# Altium PCB TP3.PcbDoc
Units mm, origin at the board's own origin, x right, y up, seen from the top; angles counter-clockwise.
Board outline 41 x 58.5 mm, 2 copper layers (Top Layer, Bottom Layer); 33 components, 18 nets, 67 pads, 2 vias.
Unrouted connection lines stored in the file: 40.
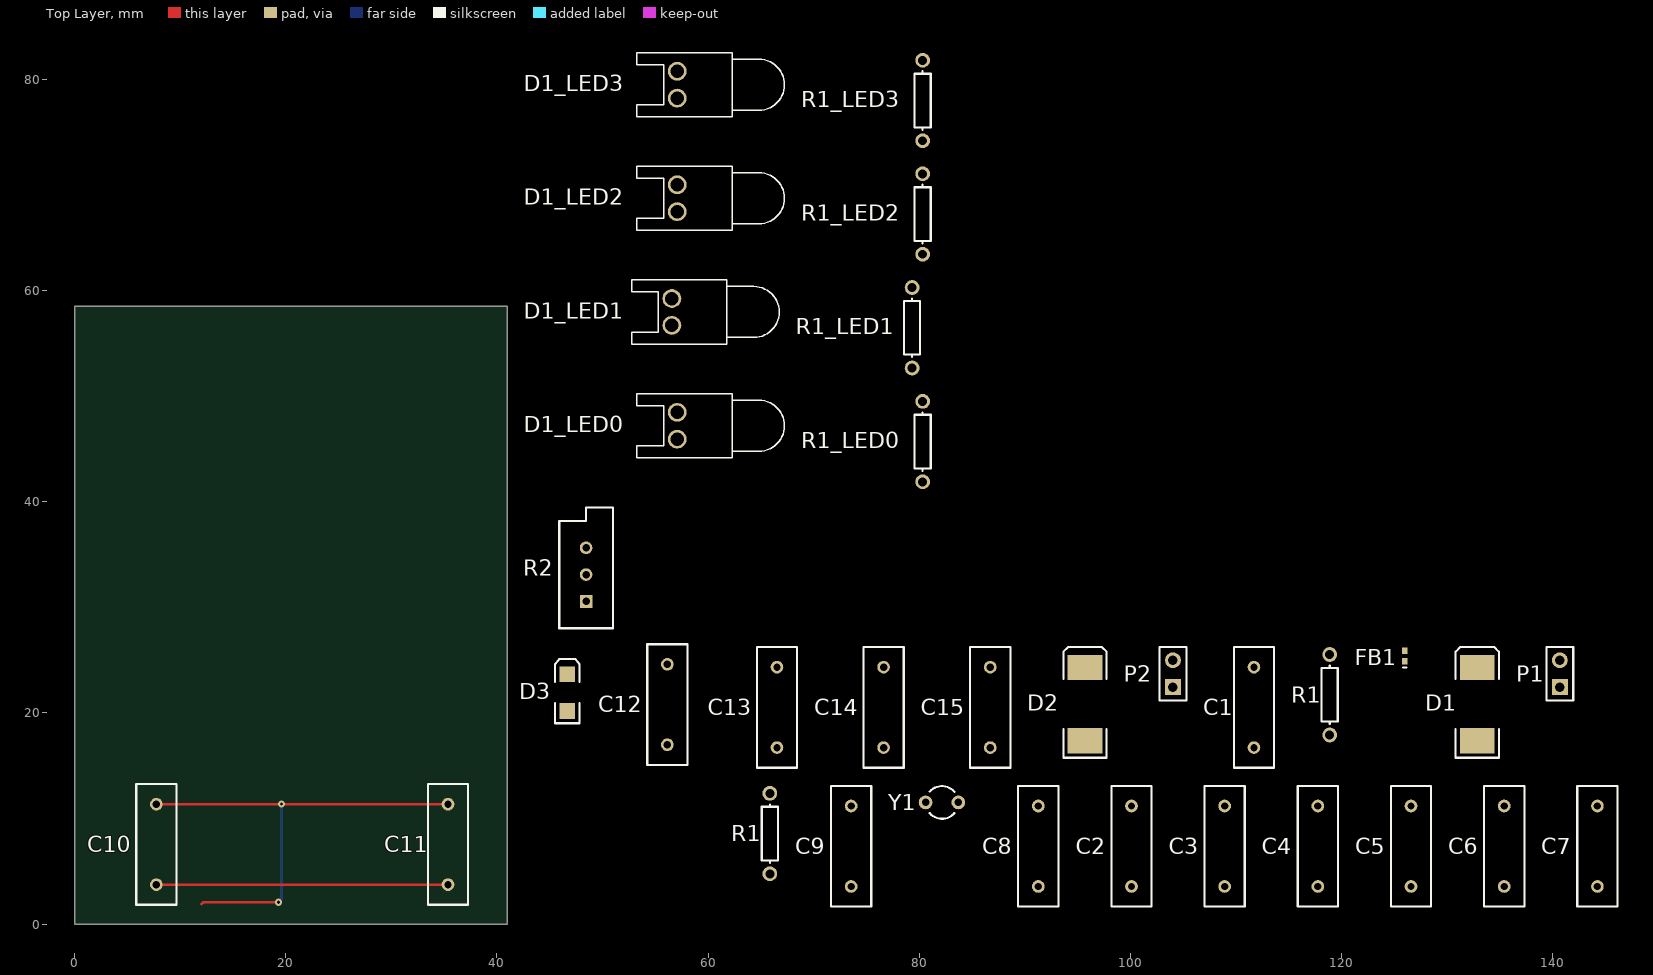
[diagram p0: Top Layer view]
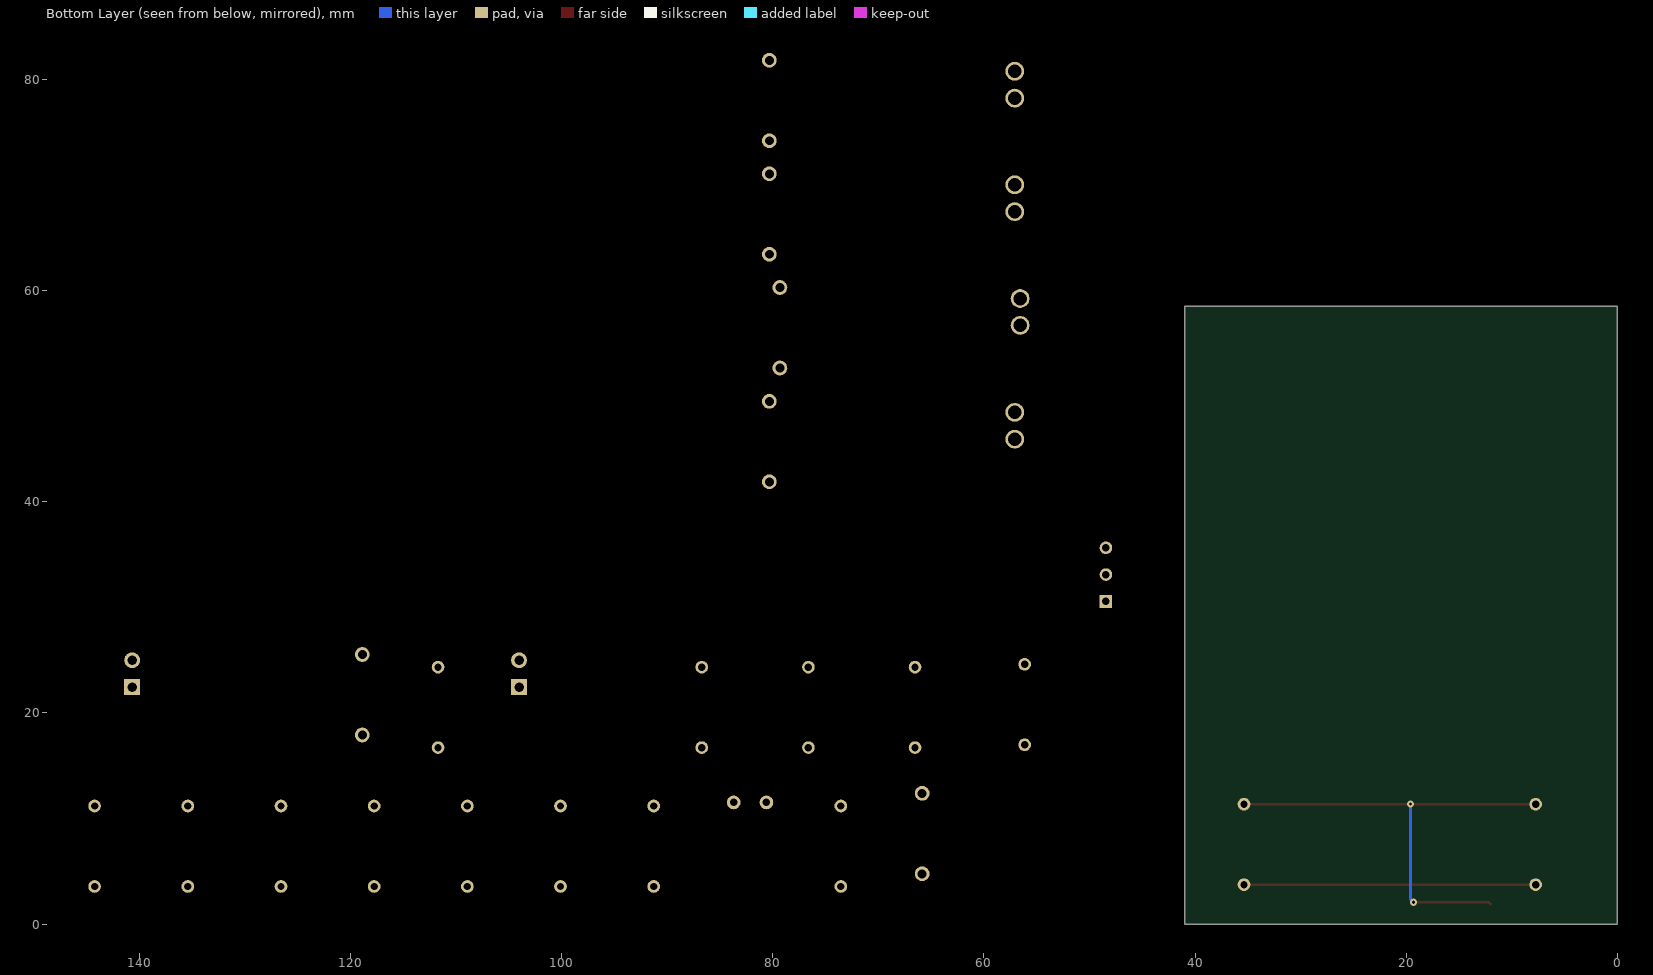
[diagram p1: Bottom Layer view, seen from below]

## Layer stack, top to bottom
Top Solder: solder mask 0.0102, Solder Resist, Dk 3.5
Top Layer: signal copper 0.0356
Dielectric 1: dielectric 0.32, FR-4, Dk 4.8
Bottom Layer: signal copper 0.0356
Bottom Solder: solder mask 0.0102, Solder Resist, Dk 3.5

## Board outline
0,0 41,0 41,58.5 0,58.5

## Design rules (kind name [scope] priority, off if disabled: settings)
Clearance [All] p1: gap=0.2
HoleSize [All] p1: absolutevalues=TRUE maxlimit=5 minlimit=0.3 maxpercent=80.000 minpercent=20.000
PolygonConnect [All] p1: connectstyle=Relief reliefconductorwidth=0.254 reliefentries=4 polygonreliefangle="90 Angle" airgapwidth=0.254
RoutingVias [All] p1: holewidth=0.3 width=0.7 viastyle="Through Hole" minholewidth=0.3 minwidth=0.7 maxholewidth=1 maxwidth=1.4
SolderMaskExpansion [All] p1: expansion=0.102
UnpouredPolygon [All] p1: allowunpoured=FALSE
Width [All] p1: maxlimit=5 minlimit=0.2 preferedwidth=0.2
28 further rules are at their usual default settings.

## Classes and differential pairs
component class LED0: D1_LED0 R1_LED0
component class LED1: D1_LED1 R1_LED1
component class LED2: D1_LED2 R1_LED2
component class LED3: D1_LED3 R1_LED3
component class PIC: C2 C3 C4 C5 C6 C7 C8 C9 C10 C11 J1 R1 U1 Y1
component class POWER: C1 C12 C13 C14 C15 D1 D2 D3 FB1 P1 P2 R1 U2
component class TP2: R2
net class LED[0..3]: LED0 LED1 LED2 LED3
channel class led: LED0 LED1 LED2 LED3

## Components (designator, comment, footprint, x,y, rotation, side; value= is the part's Value field where it differs from the comment)
C1 "10uF" RAD-0.3 111.709,20.53 r90 top
C2 "100nF" RAD-0.3 100.109,7.379 r90 top
C3 "100nF" RAD-0.3 108.934,7.379 r90 top
C4 "100nF" RAD-0.3 117.759,7.379 r90 top
C5 "100nF" RAD-0.3 126.585,7.379 r90 top
C6 "100nF" RAD-0.3 135.41,7.379 r90 top
C7 "100nF" RAD-0.3 144.236,7.379 r90 top
C8 "20pF" RAD-0.3 91.283,7.379 r90 top
C9 "20pF" RAD-0.3 73.557,7.379 r90 top
C10 "10uF" RAD-0.3 7.75,7.55 r90 top
C11 "1uF" RAD-0.3 35.375,7.55 r90 top
C12 "10uF" RAD-0.3 56.15,20.8 r90 top
C13 "10uF" RAD-0.3 66.532,20.53 r90 top
C14 "1uF" RAD-0.3 76.632,20.53 r90 top
C15 "100nF" RAD-0.3 86.733,20.53 r90 top
D1 "GF1A" SMC 132.86,20.83 r90 top
D1_LED0 "Green LED" LED-0 57.081,47.206 r90 top (schematic designator D1)
D1_LED1 "Green LED" LED-0 56.581,57.982 r90 top (schematic designator D1)
D1_LED2 "Green LED" LED-0 57.081,68.757 r90 top (schematic designator D1)
D1_LED3 "Green LED" LED-0 57.081,79.508 r90 top (schematic designator D1)
D2 "GF1A" SMC 95.708,20.83 r90 top
D3 "Green LED" 3.2X1.6X1.1 46.675,21.925 r90 top
FB1 "600r" 0402-A 125.985,25.405 r90 top
P1 "12V Main" HDR1X2 140.686,22.455 r90 top
P2 "12V Battery" HDR1X2 104.034,22.455 r90 top
R1 "470r" AXIAL-0.3 118.884,21.73 r90 top
R1 "4.7K" AXIAL-0.3 65.857,8.579 r90 top
R1_LED0 "330r" AXIAL-0.3 80.333,45.706 r90 top (schematic designator R1)
R1_LED1 "330r" AXIAL-0.3 79.333,56.481 r90 top (schematic designator R1)
R1_LED2 "330r" AXIAL-0.3 80.333,67.257 r90 top (schematic designator R1)
R1_LED3 "330r" AXIAL-0.3 80.333,78.007 r90 top (schematic designator R1)
R2 "1K" VR5 48.456,33.105 r90 top
Y1 "8MHz" R38 82.158,11.529 r90 top

## Footprints (in the part's own frame and the unit in brackets; to place one, negate y for a bottom-side part, rotate by r counter-clockwise, add the part's x,y. Pads: shape width x height; smd on the part's side, far side on the other; paste and mask are expansions set on the pad)
3.2X1.6X1.1 [mm] "SMT LED; 2 Flat Leads"
  rect 1.5x1.5 smd: 1(-1.75,0) 2(1.75,0)
  silkscreen extent -2.9,-1.15 3.2,1.15
0402-A [mm] "Chip Inductor, Body 1.0x0.5mm, IPC High Density"
  rect 0.6x0.5 smd: 1(-0.5,0) 2(0.5,0)
  silkscreen extent -1.1,-0.15 -1.1,0.15, body extent -0.55,-0.3 0.55,0.3, height 0.55
AXIAL-0.3 [mm] "Axial Device, Thru-Hole; 2 Leads; 0.3 in Pin Spacing"
  round 1.4 hole 0.85: 1(-3.81,0) 2(3.81,0)
  silkscreen extent -2.77,-0.76 2.77,0.76
HDR1X2 [mm] "Connector; Header; 2 Position"
  rect 1.5x1.5 hole 0.9: 1(0,0)
  round 1.5 hole 0.9: 2(2.54,0)
  silkscreen extent -1.27,-1.27 3.81,1.27
LED-0 [mil] "LED; 2 Leads"
  round 70 hole 50: 1(50,0) 2(-50,0)
  silkscreen extent -120,-400 120,150
R38 [mm] "Crystal, Thru-Hole; 2 Leads; Body 3.1 x 8.2 mm (Dia.xH)"
  round 1.3 hole 0.7: 1(0,1.55) 2(0,-1.55)
  silkscreen extent -1.55,-1.19 1.55,1.17
RAD-0.3 [mm] "Radial Cap, Thru-Hole; 2 Leads; 0.3 in Pin Spacing"
  round 1.2 hole 0.7: 1(-3.81,0) 2(3.81,0)
  silkscreen extent -5.72,-1.91 5.71,1.91
SMC [mm] "DO-214-AB/SMC; 2 C-Bend Leads; Body 7.9 x 5.9 mm, inc. leads (LxW)"
  rect 2.4x3.3 smd: 1(-3.475,0) 2(3.475,0)
  silkscreen extent -5.07,-2.05 5.43,2.05
VR5 [mm] "Thru-Hole; 3 Leads"
  rect 1.2x1.2 hole 0.7: 1(-2.54,0)
  round 1.2 hole 0.7: 2(0,0) 3(2.54,0)
  silkscreen extent -5.08,-2.54 6.35,2.54

## Part data
C1 C2 C3 C4 C5 C6 C7 C8 C9 C10 C11 C12 C13 C14 C15: library part Cap, "Capacitor"
D1 D2: library part Diode, "Default Diode"
D1_LED0 D1_LED1 D1_LED2 D1_LED3: library part LED0, "Typical INFRARED GaAs LED"
D3: library part LED2, "Typical RED, GREEN, YELLOW, AMBER GaAs LED"
FB1: library part Inductor, "Inductor"
P1 P2: library part "Header 2", "Header, 2-Pin"
R1 R1 R1_LED0 R1_LED1 R1_LED2 R1_LED3: library part Res1, "Resistor"
R2: library part RPot, "Potentiometer"
Y1: library part XTAL, "Crystal Oscillator"

## Via types
v1: diameter 0.7, hole 0.3, Top Layer to Bottom Layer, 2 vias

## Nets (pads, with @x,y where several pads share a name; then routed paths per layer and width w, separated by ;. In a path a pad name is that pad's centre, name@x,y a point inside that pad or via, vN(x,y) a via of type N, cw(c..) or ccw(c..) an arc to the next point about the centre after c; other vN are vias at no path point)
ALIM: D1.1 P1.1
BATTERY: D2.1 P2.1
GND: C1.1 C2.1 C3.1 C4.1 C5.1 C6.1 C7.1 C8.1 C9.1 C10.1 C11.1 C12.1 C13.1 C14.1 C15.1 D1_LED0.2 D1_LED1.2 D1_LED2.2 D1_LED3.2 D3.2 P1.2 P2.2 R2.3 | length 27.6
  Top Layer w0.254: C10.1 C11.1
LED0: R1_LED0.2
LED1: R1_LED1.2
LED2: R1_LED2.2
LED3: R1_LED3.2
MCLR: 
NetC10_2: C10.2 C11.2 | length 44.4
  Top Layer w0.254: C10.2 C11.2 ; 12.025,1.9 12.2,2.075 v1(19.325,2.075)
  Bottom Layer w0.254: v1(19.325,2.075) 19.6,2.35 v1(19.6,11.375)
NetD3_1: D3.1 R1.1@65.857,4.769
NetR2_2: R2.2
PGC: 
PGD: 
V3P3: C2.2 C3.2 C4.2 C5.2 C6.2 C13.2 C14.2 FB1.1
V3P3A: C7.2 C15.2 FB1.2 R2.1
V5: C1.2 C12.2 D1.2 D2.2 R1.2@65.857,12.389
X1: C8.2 Y1.2
X2: C9.2 Y1.1
pads on no net: D1_LED0.1 D1_LED1.1 D1_LED2.1 D1_LED3.1 R1.1@118.884,17.92 R1.2@118.884,25.54 R1_LED0.1 R1_LED1.1 R1_LED2.1 R1_LED3.1

## Silkscreen, mask and mechanical layers (free items; w line width, h text height)
Board Outline:
  the board outline again, w0.254